# EAGLE board ftdi (EAGLE 8.5.0)
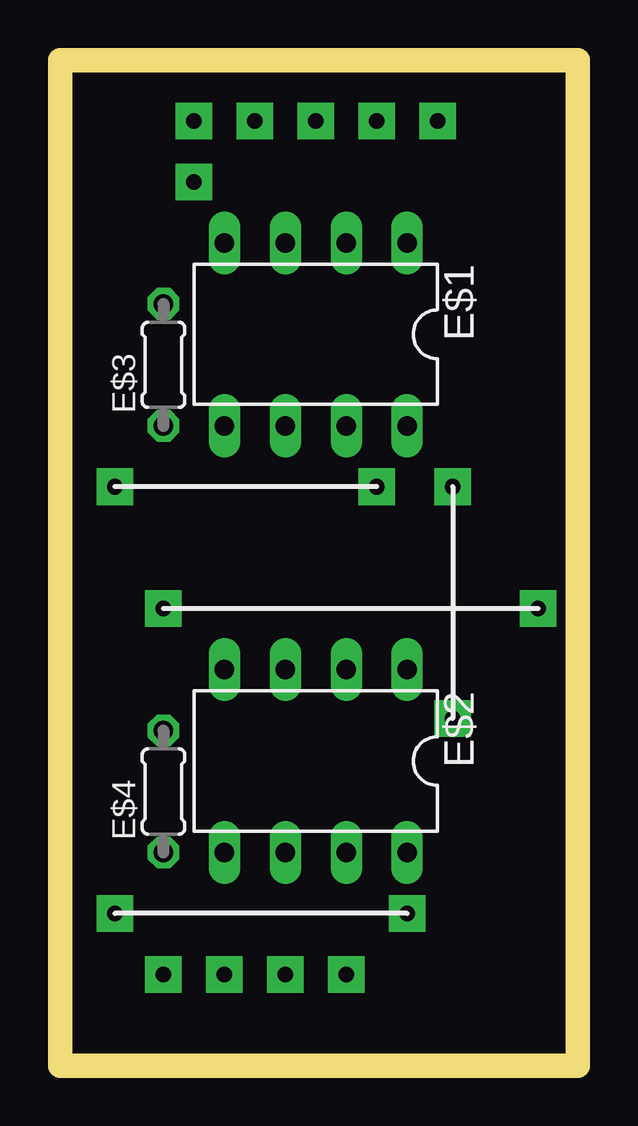
[diagram p0: board, top side]
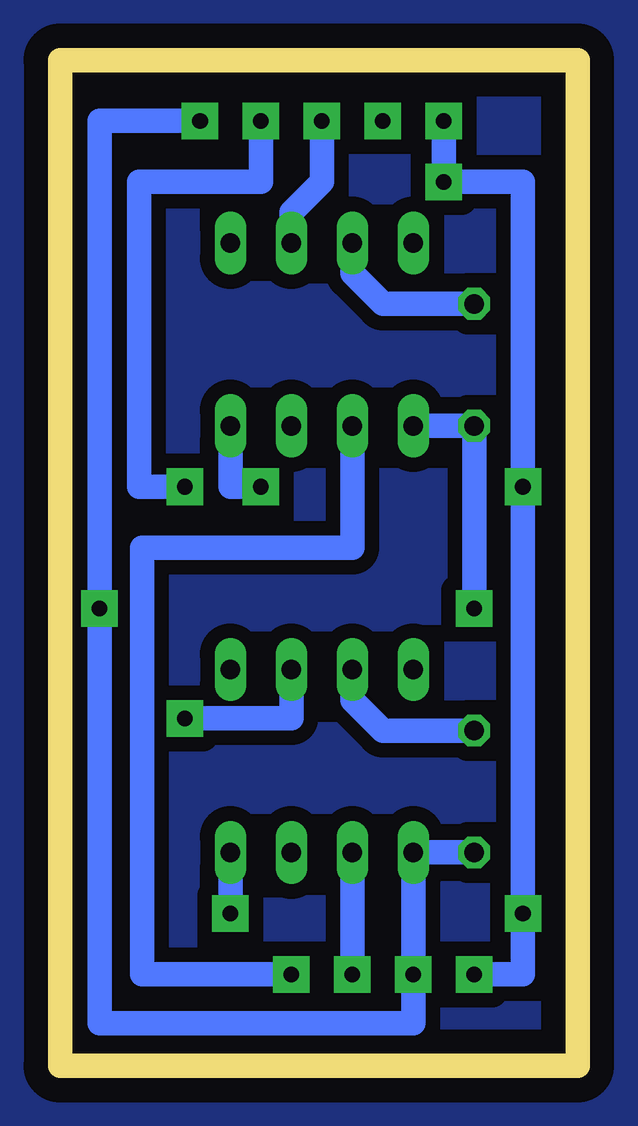
[diagram p1: board, bottom side, seen from below]

Size 21.59 x 41.91 mm. Coordinates in mm from the lower left corner, seen from the top.
Outline: 0,41.91 21.59,41.91 21.59,0 0,0 0,41.91
Copper layers (1*16): Top 0.035mm / dielectric 1.5mm / Bottom 0.035mm
Design rules "default": minimum track width 6mil, minimum drill 0.35mm, track to track 6mil, track to pad 6mil, pad to pad 6mil, via to via 6mil, smd to smd 6mil, copper to edge 40mil, drill to drill 6mil, minimum pad ring 10mil, minimum via ring 8mil, stop-mask expansion 4mil, vias tented up to drill 0mil, thermal gap 10mil

## Footprints (pad centres in the part's own frame; a part is rotated, then mirrored left to right if it is on the bottom)
DIL08 = drill 0.813 long: 1 -3.81,-3.81; 2 -1.27,-3.81; 3 1.27,-3.81; 4 3.81,-3.81; 5 3.81,3.81; 6 1.27,3.81; 7 -1.27,3.81; 8 -3.81,3.81
0204/5 = drill 0.813 octagon: 1 -2.54,0; 2 2.54,0

## Placement (x,y rotation side)
E$1  [DIL08]  10.67,30.48 180 top
E$2  [DIL08]  10.67,12.7 180 top
E$3  [0204/5]  4.32,29.21 90 top
E$4  [0204/5]  4.32,11.43 90 top

## Library data of the parts
E$1 E$2 = 40xx
E$3 E$4 = BeagleBone_Black_Wireless

## Nets
S$1: E$2.3 E$4.2
S$3: E$1.5 E$3.1
S$4: E$1.3 E$3.2
S$7: E$1.2
S$9: E$1.8
S$10: E$2.6
S$11: E$2.2
S$13: E$2.8
S$14: E$2.5 E$4.1
S$15: E$1.6

## Tracks (layer width: path | path; a pad name or v marks a point on that pad's centre or on a via)
S$1
  Bottom 1.016: E$2.3 9.4,15.24 8.13,13.97 E$4.2
S$2  (via drill 0.65 pad 1.52)
  Bottom 1.016: v13.21,39.37 13.21,36.83 18.29,36.83 18.29,24.13 v16.38,24.13
S$3  (via drill 0.65 pad 1.52)
  Bottom 1.016: v4.32,19.05 E$3.1 E$1.5
S$4
  Bottom 1.016: E$1.3 9.4,33.02 8.13,31.75 E$3.2
S$5  (via drill 0.65 pad 1.52)
  Bottom 1.016: v5.59,39.37 v5.59,36.83 2.29,36.83 v2.29,24.13 v2.29,6.35 2.29,3.81 v4.32,3.81
S$6  (via drill 0.65 pad 1.52)
  other vias: 8.13,39.37
S$7  (via drill 0.65 pad 1.52)
  Bottom 1.016: v10.67,39.37 10.67,36.83 11.94,35.56 E$1.2
S$8
  pour Bottom (isolate 0.61): -3.3,45.72 -3.3,-2.54 24.64,-2.54 24.64,45.72
S$9  (via drill 0.65 pad 1.52)
  Bottom 1.016: E$1.8 14.48,24.13 v13.21,24.13
S$10  (via drill 0.65 pad 1.52)
  Bottom 1.016: E$2.6 v9.4,3.81
S$11  (via drill 0.65 pad 1.52)
  Bottom 1.016: E$2.2 11.94,14.48 v16.38,14.48
S$13  (via drill 0.65 pad 1.52)
  Bottom 1.016: v14.48,6.35 E$2.8
S$14  (via drill 0.65 pad 1.52)
  Bottom 1.016: E$4.1 E$2.5 v6.86,3.81 6.86,1.78 19.94,1.78 v19.94,19.05 19.94,39.37 v15.75,39.37
S$15  (via drill 0.65 pad 1.52)
  Bottom 1.016: E$1.6 9.4,21.59 18.16,21.59 18.16,3.81 v11.94,3.81